# EAGLE board testbrd (EAGLE 7.7.0)
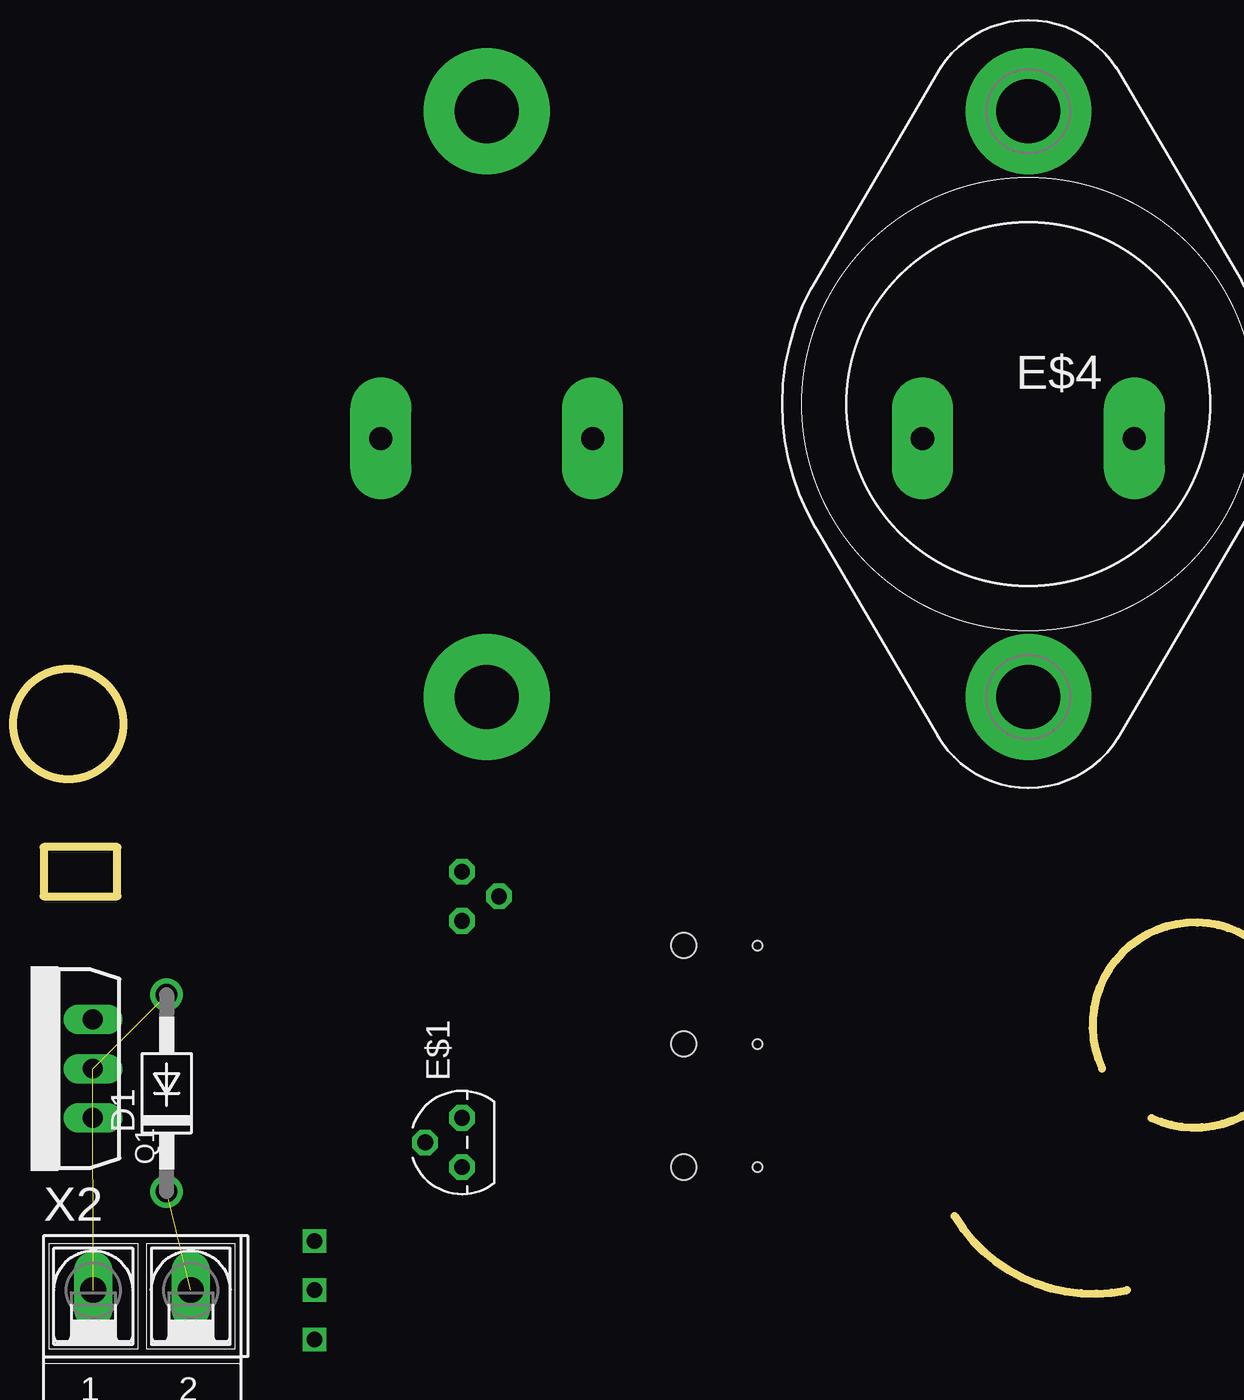
[diagram p0: board, top side]
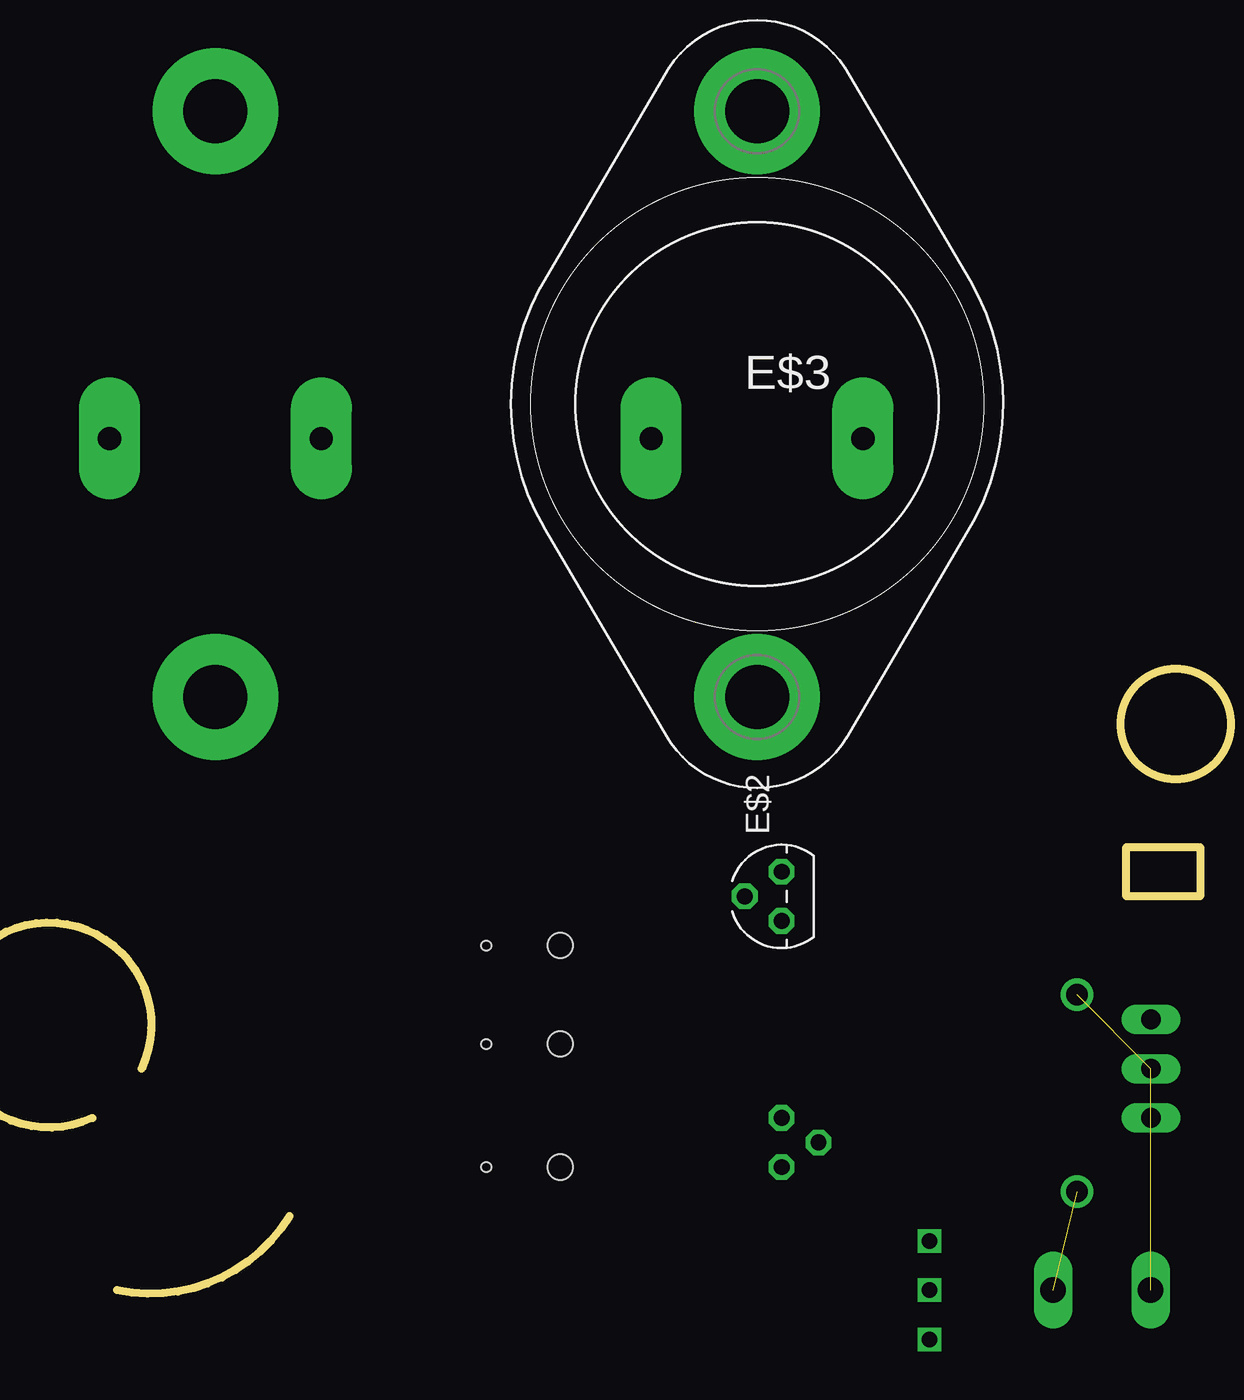
[diagram p1: board, bottom side, seen from below]

No outline drawn. Coordinates in mm, seen from the top.
Copper layers (1*16): Top 0.035mm / dielectric 1.5mm / Bottom 0.035mm
Design rules "esc_spray_etcher": minimum track width 10mil, minimum drill 24mil, track to track 16mil, track to pad 16mil, pad to pad 0.205mm, via to via 0.205mm, smd to smd 8mil, copper to edge 4mil, drill to drill 8mil, minimum pad ring 10mil, minimum via ring 8mil, stop-mask expansion 4mil, vias tented up to drill 0mil, thermal gap 10mil
Net classes: 0 default: width 0.406 mm, drill 0.8 mm, clearance 0.203 mm
Holes 1.3 mm at 40.64,25.4 40.64,20.32 40.64,13.97
Holes 0.5 mm at 44.45,25.4 44.45,20.32 44.45,13.97
Milling: area 6.1,34 to 11.7,39.7; 17 lines

## Footprints (pad centres in the part's own frame; a part is rotated, then mirrored left to right if it is on the bottom)
DO41-10 = drill 1.118: A 5.08,0; C -5.08,0
TO-92 = drill 0.813 octagon: 1 -1.27,0; 2 0,1.905; 3 1.27,0
TO3A = drill 1.194 pad 3.15 long: 1 -1.778,-5.461; 2 -1.778,5.461 | drill 3.302 pad 6.477: 3 15.113,0; 4 -15.113,0
TO262-H = drill 1.016 long: 1 -2.54,0; 2 0,0; 3 2.54,0
AK500/2-H = drill 1.321 long: 1 -2.515,0; 2 2.515,0

## Placement (x,y rotation side)
D1  1N4004  [DO41-10]  13.97,17.78 90 top
E$1  [TO-92]  29.21,15.24 90 top
E$2  [TO-92]  29.21,27.94 90 bottom
E$3  [TO3A]  30.48,53.34 90 bottom
E$4  [TO3A]  58.42,53.34 90 top
Q1  IRF1010NL  [TO262-H]  10.16,19.05 90 top
X2  [AK500/2-H]  12.7,7.62 0 top

## Library data of the parts
D1 = diode
E$1-E$4 = transistor-fet
Q1 = transistor_fet
X2 = con-ptr500; OC_FARNELL: unknown; OC_NEWARK: unknown

## Nets
+12V: D1.C X2.2
N$1: Q1.1
N$2: D1.A Q1.2 X2.1
S$1: Q1.3

## Tracks (layer width: path | path; a pad name or v marks a point on that pad's centre or on a via)
+12V  (1 unrouted)
N$2  (2 unrouted)
S$2  (via drill 0.8)
  other vias: 21.59,5.08
S$3  (via drill 0.8)
  other vias: 21.59,7.62
S$4  (via drill 0.8)
  other vias: 21.59,10.16